# Altium PCB 56PCB原始 -已解锁.pcbdoc (part 2 of 3)
Units mm, origin at the board's own origin, x right, y up, seen from the top; angles counter-clockwise.
Board outline 101.98 x 99.56 mm, 2 copper layers (Top Layer, Bottom Layer); 160 components, 0 nets, 663 pads, 274 vias.
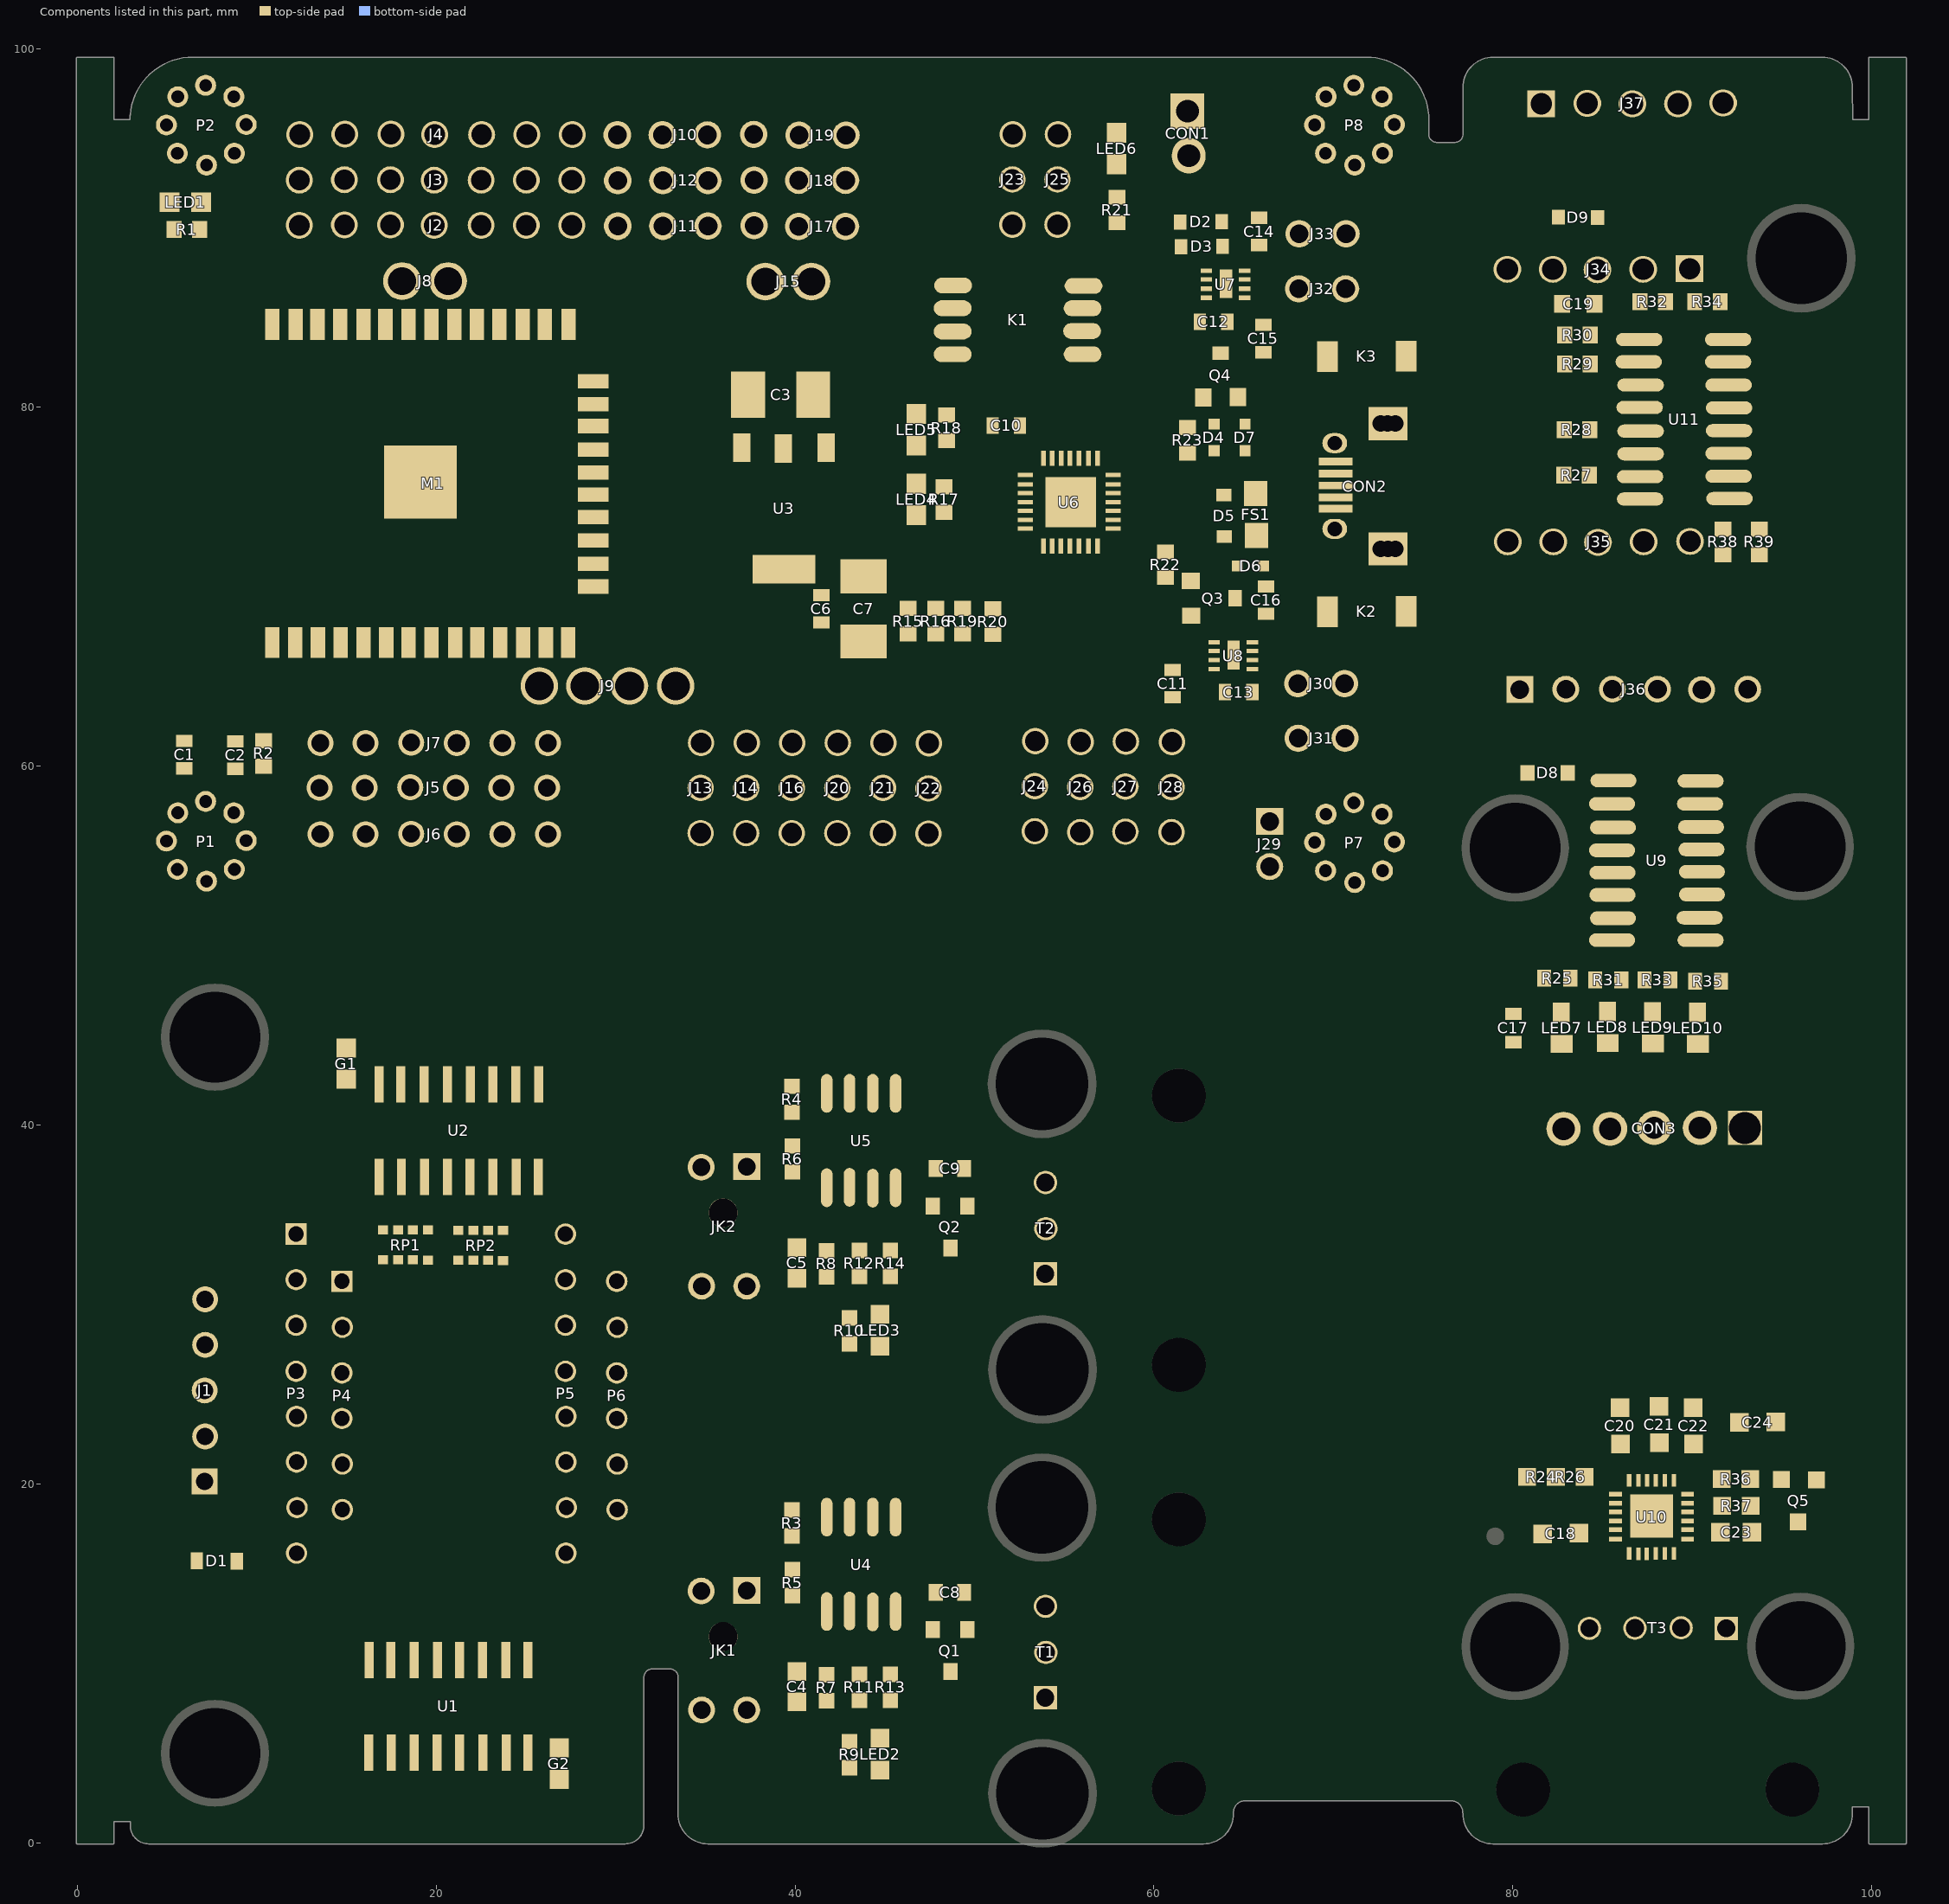
[diagram p2: the components of this part, seen from the top]

## Via types
v1: diameter 0.6, hole 0.4, Top Layer to Bottom Layer, tented both sides, 274 vias

## Nets (pads, with @x,y where several pads share a name; then routed paths per layer and width w, separated by ;. In a path a pad name is that pad's centre, name@x,y a point inside that pad or via, vN(x,y) a via of type N, cw(c..) or ccw(c..) an arc to the next point about the centre after c; other vN are vias at no path point) (continued)
copper on no net: | length 3941.9
  Top Layer w0.125: 78.241,89.351 78.622,89.732 78.622,90.976 79.663,92.018 97.723,92.018 97.875,92.17 97.875,97.91 97.266,98.52 82.026,98.52 81.645,98.139 81.645,97.148 81.416,96.92 79.638,96.92 v1(78.673,97.885) ; 80.959,69.589 80.959,74.898 ; 82.749,85.769 82.749,86.366 83.524,87.141 83.524,88.843 82.991,89.376 78.317,89.376 78.012,89.071 78.012,70.097 78.622,69.488 97.621,69.488 98.18,70.047 98.18,83.382 97.291,84.271 v1@94.954,84.271
  Top Layer w0.151: 4.143,20.142 7.102,20.142 ; v1@6.353,40.284 8.969,40.284 11.255,42.57 v1(11.255,48.641) ; v1@6.404,40.411 5.616,40.411 4.118,38.913 4.118,8.56 4.372,8.306 5.616,8.306 6.454,9.144 8.994,9.144 11.687,6.452 11.687,2.311 v1(11.026,1.651) ; v1@11.026,1.524 11.915,0.635 29.238,0.635 30.178,1.575 v1(30.178,1.829) ; v1@11.179,48.666 11.407,48.895 v1@29.06,48.895 ; v1(12.271,13.894) 15.319,13.894 15.649,13.564 v1@15.649,12.903 ; 14.43,48.895 14.709,48.616 14.709,44.247 ; v1(18.113,39.319) 22.507,39.319 v1@22.914,39.726 ; v1@27.435,11.278 27.943,11.278 29.645,12.979 v1(29.645,16.104) ; 29.06,49.149 29.289,48.92 v1(29.289,42.57) ; v1@29.213,34.569 v1@29.213,42.697
  Top Layer w0.176: 88.985,16.142 91.106,14.021
  Top Layer w0.202: 37.087,77.26 36.35,77.26 35.791,77.819 35.791,80.969 36.604,81.781 38.154,81.781 38.281,81.654
  Top Layer w0.227: 55.057,85.528 54.486,86.099 54.486,87.369 56.111,88.995 59.998,88.995 61.382,87.611 62.919,87.611 ; 56.01,86.938 56.01,87.877 56.569,88.436 59.718,88.436 61.026,87.128 62.919,87.128 ; 65.052,86.62 68.164,86.62 ; 65.052,87.128 66.436,87.128 v1@67.008,87.7
  Top Layer w0.252: 49.05,68.853 48.949,68.954 48.949,71.672 51.26,73.984 51.26,75.101 51.87,75.711 52.822,75.711 ; 50.498,75.355 51.387,76.244 52.822,76.244 ; 51.031,68.777 51.031,68.878 50.346,69.564 50.346,72.129 51.87,73.653 51.87,74.441 52.149,74.72 52.822,74.72 ; v1(54.74,79.597) 54.829,79.508 54.829,77.159 ; 55.311,77.159 55.311,78.848 v1(56.721,80.257) ; 55.819,75.546 55.819,77.159 ; 57.724,74.238 58.448,74.238 59.617,73.069 v1(59.617,72.917) ; 57.724,74.72 59.134,74.72 59.54,74.314 v1(59.769,74.314) ; 57.724,75.228 58.982,75.228 59.439,75.685 v1(59.769,75.685) ; 57.724,76.244 58.702,76.244 59.134,76.676 60.785,76.676 ; 60.633,70.529 61.928,70.529 ; 60.683,71.85 60.785,71.952 60.785,80.384 62.284,81.883 63.452,81.883 64.671,80.664 ; v1(61.801,67.126) 61.801,66.897 62.271,66.427 63.35,66.427 ; 61.877,77.463 61.699,77.286 61.699,73.298 63.274,71.723 63.274,69.539 62.131,68.396 62.08,68.396 ; 63.35,66.91 v1@63.35,67.888 ; 64.519,69.361 65.268,68.611 69.662,68.611 ; 65.484,65.919 66.284,65.919 68.024,64.179 68.024,61.563 ; 65.484,66.427 66.767,66.427 67.364,65.83 69.726,65.83 70.564,64.992 70.564,61.766 ; 82.318,20.218 82.318,19.202 83.067,18.453 85.721,18.453 ; 83.689,17.259 83.689,17.45 84.185,17.945 85.721,17.945 ; 83.791,20.472 83.791,19.787 84.642,18.936 85.721,18.936 ; v1@85.62,15.011 86.483,15.875 86.483,16.142 ; 85.721,17.462 87.194,17.462 v1@88.325,17.462 ; v1@88.261,18.796 88.972,19.507 88.972,20.206 ; 89.734,17.462 91.347,17.462 ; 89.734,18.936 91.424,18.936 ; 89.734,19.444 89.773,19.444 90.75,20.422 91.411,20.422
  Top Layer w0.254: 88.972,15.243 88.972,16.142
  Top Layer w0.278: 9.452,40.767 9.452,40.183 16.31,33.325 25.123,33.325 25.174,33.376 ; v1(53.825,80.816) 53.825,83.407 54.689,84.271 55.908,84.271 ; 55.057,85.528 56.023,85.528 ; v1@55.324,80.664 55.324,82.518 55.629,82.823 ; 63.35,77.59 v1(63.35,76.803) 63.63,76.524 66.754,76.524 68.291,74.987 70.126,74.987 ; v1(64.417,77.59) 66.678,77.59 68.621,75.647 70.126,75.647 ; v1(78.101,47.981) 78.508,47.574 78.508,45.669 ; v1@78.152,59.411 78.152,64.592 v1@78.406,64.846 ; 78.152,62.027 78.355,61.824 80.667,61.824 ; 79.016,17.094 80.413,15.697 84.858,15.697 85.721,16.561 85.721,16.929 ; 79.981,46.177 79.981,48.412 81.886,50.317 85.531,50.317 ; 80.209,46.177 78.736,46.177 78.508,45.949 v1(78.508,36.855) 97.507,36.855 97.735,37.084 v1@97.735,51.714 ; 80.311,64.338 80.311,62.179 80.667,61.824 ; v1(97.786,51.613) cw(c96.429,55.431) v1(97.761,59.258) 97.761,64.719 97.202,65.278 97.202,64.948 94.078,61.824 80.667,61.824
  Top Layer w0.303: 8.944,59.912 10.747,59.912 11.407,60.572 11.407,63.112 13.411,65.116 13.411,66.897 ; 47.831,68.802 47.806,68.827 47.806,71.545 50.498,74.238 50.498,75.355
  Top Layer w0.329: v1@34.521,71.571 35.283,70.809 35.283,61.83 34.763,61.309 ; 37.303,61.309 37.303,61.347 ; 46.307,68.802 47.831,68.802 ; 61.903,79.013 61.903,79.699 62.741,80.537 62.741,80.562
  Top Layer w0.354: 5.362,89.986 5.362,91.459 ; 6.734,89.96 6.785,90.011 9.629,90.011 12.423,87.217 v1@14.532,87.217 ; v1@10.671,80.638 9.807,79.775 9.807,70.707 12.068,68.446 21.745,68.446 22.355,67.837 22.355,67.049 ; v1(11.611,78.454) 11.763,78.302 11.763,71.774 13.312,70.224 22.431,70.224 24.819,67.837 24.819,66.745 ; v1(11.687,82.137) 11.687,80.232 10.595,79.14 10.595,71.545 12.779,69.361 22.101,69.361 23.574,67.888 23.574,66.973 ; 12.144,84.728 12.144,83.356 12.703,82.797 12.703,72.129 13.668,71.164 22.888,71.164 v1(24.641,69.412) ; v1(13.211,63.29) 12.195,62.274 12.195,57.524 13.389,56.331 ; 13.338,84.525 13.516,84.347 13.516,72.815 v1(14.1,72.231) ; v1@14.405,88.436 15.192,88.436 16.132,89.376 16.132,93.923 17.529,95.32 ; v1(14.43,73.704) 14.328,73.806 14.328,79.47 v1(15.141,80.283) ; 14.655,84.626 14.684,84.598 14.684,82.264 16.564,80.384 23.726,80.384 23.726,79.445 24.361,78.81 v1@25.708,78.81 ; 14.735,67.227 14.735,57.55 16.068,56.216 ; v1(15.878,64.56) 15.951,64.633 15.951,66.897 ; 15.979,84.448 15.979,82.67 17.148,81.502 22.685,81.502 24.006,82.823 v1(25.53,82.823) ; v1@17.17,83.004 17.17,84.626 ; v1@17.221,63.141 17.221,66.897 ; 18.465,66.897 18.465,64.106 19.789,62.782 19.789,57.524 18.672,56.407 ; v1(19.662,82.797) 19.789,82.924 19.789,84.572 19.735,84.626 ; 19.735,66.897 19.735,64.868 v1(20.983,63.62) ; 21.005,84.626 21.085,84.547 v1@21.085,82.67 ; 21.056,66.897 21.056,65.402 22.38,64.078 22.38,57.55 23.688,56.242 23.688,56.216 ; 22.275,84.626 22.329,84.572 22.329,82.899 v1(22.406,82.823) ; 22.507,95.193 21.263,93.948 21.263,89.097 22.685,87.674 23.472,87.674 24.895,86.252 24.895,84.706 24.815,84.626 ; v1@22.71,86.709 23.599,85.82 23.599,84.677 23.422,84.499 ; v1@22.939,65.195 23.65,64.484 25.746,64.484 ; 23.726,80.232 23.726,81.096 24.361,81.731 26.317,81.731 27.028,82.442 v1(27.028,82.747) ; v1(23.853,88.893) 23.828,88.919 23.828,93.948 24.971,95.091 25.073,95.091 ; v1(24.742,79.927) 25.047,80.232 28.679,80.232 ; 24.819,67.151 24.819,68.065 25.784,69.031 29.949,69.031 31.346,70.428 v1@31.346,83.585 ; 26.06,84.626 26.06,85.715 26.901,86.557 v1(29.01,86.557) ; 26.139,67.075 26.139,68.142 26.343,68.345 30.407,68.345 32.312,70.25 32.312,73.628 v1(32.413,73.73) ; v1(26.317,89.046) 26.317,93.846 27.587,95.116 ; 27.381,84.626 28.552,84.626 29.187,83.991 v1(29.187,83.966) ; 27.435,66.922 31.194,66.922 33.302,69.031 33.302,74.39 32.388,75.304 32.388,84.804 31.423,85.769 31.423,93.846 32.743,95.167 ; 28.752,71.291 29.949,71.291 30.508,71.85 30.508,82.569 30.254,82.823 30.254,87.827 28.908,89.173 28.908,93.897 30.095,95.085 ; 28.752,81.451 v1@28.752,82.591 ; v1(32.667,86.582) 32.667,87.725 33.988,89.046 33.988,93.923 35.258,95.193 35.258,95.269 ; v1(33.353,79.699) 33.277,79.775 33.277,85.261 34.14,86.125 34.14,86.734 36.452,89.046 36.452,93.846 37.722,95.116 ; v1(36.604,87.852) 37.468,88.716 40.973,88.716 41.557,89.3 41.557,93.872 42.878,95.193 42.929,95.193 ; 37.303,61.347 38.154,62.198 38.154,66.999 v1(38.636,67.481) ; v1@39.068,91.154 39.017,91.205 39.017,93.872 40.313,95.167 ; v1@39.449,65.678 39.449,61.715 39.779,61.385 ; v1@40.821,64.865 41.024,64.662 41.024,62.554 42.268,61.309 42.383,61.309 ; v1(42.421,63.773) 42.446,63.773 43.005,64.332 52.886,64.332 55.857,61.36 ; v1@43.64,62.833 44.3,63.493 52.149,63.493 53.267,62.376 53.267,61.385 ; v1(45.799,72.561) 45.799,72.968 46.764,73.933 46.764,73.996 ; 47.069,77.667 47.882,76.854 v1(48.237,76.854) ; 62.563,84.779 62.842,85.058 62.842,86.506 ; v1(81.848,76.117) 82.762,76.117 ; 82.889,82.416 82.889,81.299 v1(82.991,81.197) ; v1(82.991,77.54) 82.991,78.683 ; 84.413,76.143 87.093,76.143 ; 84.439,82.543 87.017,82.543 ; 84.566,78.708 84.591,78.683 87.118,78.683 ; 87.067,80.003 88.757,80.003 89.595,80.842 89.595,85.185 90.204,85.795 ; 87.118,81.248 88.579,81.248 88.884,81.553 88.884,85.363 88.579,85.668 88.579,85.845
  Top Layer w0.379: 16.818,37.122 16.818,35.763 17.884,34.696 17.884,34.176 ; 17.046,34.176 17.046,34.214 15.573,35.687 15.573,38.557 18.037,41.021 18.037,42.494 ; 18.062,37.122 18.062,35.916 18.697,35.281 18.697,34.29 ; v1(19.231,40.437) 19.332,40.538 19.332,42.278 ; 19.358,37.122 19.358,36.017 19.535,35.839 19.535,34.176 ; 20.628,37.211 20.628,35.535 21.237,34.925 21.237,34.15 ; 21.872,37.122 21.872,35.535 22.126,35.281 22.126,34.29 ; 22.558,4.826 22.558,7.112 23.65,8.204 25.377,8.204 26.038,8.865 26.038,34.442 26.851,35.255 26.851,39.929 25.708,41.072 25.708,42.278 ; 22.914,34.315 22.914,35.281 23.168,35.535 23.168,37.122 ; v1(22.99,39.675) 25.098,39.675 25.682,39.091 25.682,35.382 25.174,34.874 25.174,33.376 ; 23.726,34.15 23.726,34.417 24.463,35.154 24.463,37.122 ; 23.853,4.801 23.853,6.883 24.361,7.391 26.52,7.391 31.194,12.065 31.194,30.277 30.165,31.305 ; 26.952,0.787 26.952,1.118 ; 26.952,0.94 26.952,3.531 ; 27.155,16.104 28.756,17.704 28.756,27.102 30.089,28.435 30.089,28.74 ; 27.206,26.289 27.206,26.746 28.552,28.092 28.552,29.972 29.886,31.305 ; 57.915,95.307 57.978,95.243 60.658,95.243 61.852,96.437 ; v1@80.781,82.315 80.781,75.076 81.873,73.984 86.928,73.984 87.182,74.238 87.182,74.898 ; 80.933,79.14 v1(81.721,79.14) ; 87.118,77.413 89.087,77.413 89.214,77.286 89.214,74.339 89.671,73.882 91.119,73.882 91.703,73.298 ; 89.9,72.333 90.433,71.799 91.703,71.799
  Top Layer w0.405: 7.115,27.686 7.166,27.737 9.071,27.737 10.036,26.772 10.036,11.938 14.709,7.264 17.961,7.264 18.773,6.452 18.773,5.042 ; 7.42,30.302 9.172,30.302 10.849,28.626 10.849,12.268 15.04,8.077 18.443,8.077 20.043,6.477 20.043,5.042 ; 12.22,16.154 12.982,16.154 13.541,16.713 13.541,22.581 14.621,23.66 14.748,23.66 ; 12.22,23.774 12.22,23.8 14.633,26.213 ; v1(14.963,32.969) 14.252,32.969 13.592,32.309 13.592,28.245 14.278,27.559 15.751,27.559 16.64,26.67 16.64,14.986 17.478,14.148 17.478,10.198 ; 15.497,13.081 16.259,12.319 16.259,9.982 ; v1@15.929,29.972 16.005,29.896 16.005,28.677 17.453,27.229 17.453,15.926 18.723,14.656 18.723,10.617 ; 17.097,32.385 17.097,29.108 v1(17.224,28.981) ; 17.961,32.385 17.961,29.693 18.265,29.388 v1@18.265,28.651 ; v1(18.57,23.165) 18.57,23.216 19.307,23.952 19.307,29.667 18.697,30.277 18.697,32.499 ; v1@19.078,21.006 19.078,16.078 20.069,15.088 20.069,10.198 ; 19.535,32.474 19.535,30.937 20.348,30.124 v1@20.348,24.46 ; v1@20.221,19.812 20.221,16.612 21.288,15.545 21.288,10.287 ; v1@20.805,31.394 20.805,32.106 21.11,32.41 ; v1(21.136,7.849) 21.263,7.722 v1(21.263,3.15) ; v1(21.364,17.526) 21.364,27.102 22.075,27.813 22.075,32.474 ; v1@22.482,22.047 22.482,26.213 22.888,26.619 22.888,32.474 ; v1(22.507,18.72) 22.583,18.644 22.583,10.198 ; v1(23.676,25.324) 23.803,25.451 23.803,32.372 ; 23.803,10.185 v1(23.803,22.758) ; v1@24.717,26.06 25.098,25.679 25.098,10.058 ; v1(48.441,87.801) 48.441,87.776 49.101,87.115 49.101,86.861 ; 48.695,85.541 50.549,85.541 v1(50.777,85.769) ; 48.783,84.232 50.587,84.232 51.844,85.49 v1(51.844,86.582) ; 58.397,65.195 58.397,61.36 58.448,61.309 ; 69.637,74.352 69.535,74.352 69.065,73.882 68.253,73.882 68.049,73.679 68.049,73.171 68.024,73.145 66.906,73.145 66.906,74.441 66.703,74.644 65.281,74.644 65.179,74.746 65.179,75.279 65.332,75.431 66.678,75.431 67.757,74.352 70.126,74.352 ; 79.689,72.561 79.689,82.95 80.781,84.042 82.889,84.042 ; 82.305,72.409 82.33,72.409 84.134,70.605 92.973,70.605 93.837,71.469 93.837,71.799 ; 84.362,84.118 84.693,83.788 87.042,83.788 ; 84.718,89.401 90.966,89.401 91.449,88.919 91.449,88.208 92.795,86.861 92.795,84.017 92.617,83.839 ; 87.207,85.795 87.207,87.598 ; 89.925,87.649 90.382,87.649 91.551,86.48 91.551,85.896 ; 92.109,82.543 93.557,82.543 94.141,81.959 94.141,73.552 93.938,73.349 93.71,73.349
  Top Layer w0.43: 20.094,44.628 20.653,44.069 20.653,42.164 ; v1@47.831,66.237 47.831,67.38 ; 49.33,67.38 49.33,66.618 50.752,65.195 58.397,65.195 ; 57.661,65.195 62.69,65.195 62.995,65.5 62.995,65.703 63.071,65.779 63.452,65.779 ; 62.83,65.335 63.388,65.335 ; 70.678,86.798 70.704,86.823 70.704,89.681
  Top Layer w0.456: v1(21.618,44.78) 21.898,44.501 21.898,42.278 ; 23.168,42.278 v1@23.168,44.145 ; 46.764,79.635 48.58,79.635 ; 48.593,78.149 48.593,78.073 49.66,77.006 ; 48.783,82.962 49.342,82.962 49.584,82.721 v1(49.584,81.883) ; v1(61.649,84.423) 61.674,84.423 62.03,84.779 62.563,84.779 ; v1(61.826,82.924) 61.852,82.95 69.548,82.95 ; v1(95.17,16.866) 95.17,16.891 95.932,17.653 95.932,18.034
  Top Layer w0.481: 5.972,61.411 7.013,62.452 10.214,62.452 ; 10.29,61.512 10.29,63.824 v1@10.798,64.332 ; 20.653,42.266 20.653,39.649 20.856,39.446 ; 26.47,70.504 26.952,70.021 28.883,70.021 ; 34.845,7.772 36.293,9.22 39.874,9.22 40.154,9.5 40.154,13.03 39.722,13.462 ; 34.845,31.388 36.293,32.836 39.874,32.836 40.154,33.115 40.154,36.646 39.722,37.077 ; 35.353,7.29 35.353,7.772 ; 35.353,30.905 35.353,31.388 ; 37.309,14.072 37.36,14.072 38.299,15.011 38.299,17.856 38.884,18.44 39.823,18.44 ; 37.309,37.687 37.36,37.687 38.299,38.627 38.299,41.472 38.884,42.056 39.823,42.056 ; 39.823,17.107 39.849,17.081 39.849,15.291 39.976,15.164 46.504,15.164 47.062,14.605 47.062,9.042 45.983,7.963 43.583,7.963 ; 39.823,40.722 39.849,40.697 39.849,38.906 39.976,38.779 46.504,38.779 47.062,38.22 47.062,32.658 45.983,31.578 43.583,31.578 ; 40.331,12.827 41.728,12.827 ; 40.331,36.442 41.728,36.442 ; 41.754,9.385 43.595,9.385 ; 41.754,33.001 43.595,33.001 ; 43.037,9.614 43.037,12.929 ; 43.037,33.229 43.037,36.544 ; 44.37,13.03 44.37,11.227 45.31,10.287 45.31,9.411 ; 44.37,36.646 44.37,34.842 45.31,33.902 45.31,33.026 ; 45.691,12.751 46.935,12.751 ; 45.691,36.366 46.935,36.366 ; 46.935,11.709 47.723,11.709 ; 46.935,35.325 47.723,35.325 ; 47.24,14.021 47.926,14.021 ; 47.24,37.636 47.926,37.636 ; 57.94,91.713 57.94,93.529 ; 68.075,86.531 68.176,86.633 68.176,89.592 68.087,89.681 ; 83.867,20.345 84.324,20.345 86.305,22.327 92.782,22.327 ; v1@89.341,79.241 90.103,80.003 92.135,80.003 ; v1(90.306,77.438) 92.02,77.438 ; v1@90.408,76.168 92.02,76.168 ; v1(90.433,81.248) 92.02,81.248 ; v1@90.458,78.708 92.046,78.708 ; 92.782,23.368 92.782,21.844 93.189,21.438 94.332,21.438 94.954,20.815 94.954,20.256 ; 93.113,18.72 93.113,21.514
  Top Layer w0.506: 46.84,75.508 48.212,75.508 48.288,75.584
  Top Layer w0.532: 6.658,15.735 v1@6.658,16.662 ; 8.944,15.519 8.944,10.846 14.913,4.877 14.913,2.896 15.954,1.854 24.082,1.854 25.073,2.845 25.073,5.131 25.174,5.232 26.787,5.232 26.851,5.296 ; v1(12.347,42.316) 16.589,42.316 16.818,42.545 16.818,44.145 18.723,46.05 23.371,46.05 24.412,45.009 24.412,42.139 ; 17.503,1.854 17.503,5.042 ; 64.646,71.164 64.646,72.206 65.23,72.79 65.789,72.79 ; 65.052,85.845 65.916,85.845 v1(66.043,85.718)
  Top Layer w0.557: 43.24,3.988 44.827,3.988 ; 43.24,27.603 44.827,27.603 ; 44.853,5.715 v1(45.97,5.715) ; 44.853,29.33 v1(45.97,29.33) ; 48.688,9.449 49.272,9.449 v1(49.831,10.008) ; 48.688,33.064 49.272,33.064 v1(49.831,33.623) ; 63.909,88.893 65.713,88.893 65.865,89.046
  Top Layer w0.633: 51.031,77.336 51.031,81.705 v1(52.479,83.153)
  Top Layer w0.659: 82.534,90.608 82.622,90.519 v1(83.397,90.519) ; 84.718,85.845 84.718,90.582
  Top Layer w0.71: v1@46.256,71.317 46.307,71.317 49.634,74.644 49.634,77.032 49.761,77.159 54.054,77.159 ; v1(80.108,59.563) 80.184,59.639 80.819,59.639 ; 81.708,48.057 81.708,47.269 82.673,46.304 82.673,46.177 ; v1@83.029,58.623 83.029,59.766 ; v1@83.08,48.844 83.181,48.743 83.181,48.082 ; 84.527,48.057 84.527,46.99 85.112,46.406 85.112,46.279 ; 85.391,51.562 87.144,51.562 v1(87.245,51.46) ; 85.531,57.912 v1@87.194,57.912 ; 85.556,52.832 v1@88.134,52.832 ; 85.607,59.207 v1@87.144,59.207 ; v1(85.823,48.92) 85.95,48.793 85.95,47.955 ; 87.372,48.031 87.372,46.609 87.677,46.304 ; v1(87.728,55.931) 87.728,56.617 89.023,57.912 90.522,57.912 ; v1@88.718,59.182 90.458,59.182 ; 88.782,48.108 88.782,48.755 88.363,49.174 88.363,50.876 89.049,51.562 90.522,51.562 ; 90.141,46.444 90.141,48.133 ; 90.535,52.857 91.97,52.857 92.909,51.918 v1(92.909,51.486) ; 90.623,50.241 92.909,50.241 93.621,49.53 93.621,44.679 v1@93.443,44.501 ; 91.601,48.031 v1@91.601,49.035
  Top Layer w0.786: v1(62.995,75.406) 64.036,75.406 64.036,74.593 v1(63.071,74.593) ; 63.198,74.974 63.681,74.974 63.757,74.898
  Top Layer w0.837: 37.773,89.96 40.211,89.96
  Top Layer w0.862: v1@10.798,64.332 11.103,64.332 12.144,65.373 12.144,67.024
  Top Layer w0.913: 80.032,44.628 80.159,44.501 v1@93.443,44.501
  Top Layer w0.938: 12.347,92.678 15.09,92.678 ; 17.605,92.653 19.993,92.653 ; 39.271,77.768 39.424,77.616 39.424,71.164 ; 39.5,75.939 35.995,75.939 34.674,77.26 34.674,81.4 38.255,84.982 41.786,84.982 43.615,86.811 v1(43.615,87.801)
  Top Layer w0.989: 16.043,58.832 18.557,58.832 ; 23.637,58.807 26.177,58.807
  Bottom Layer w0.151: 78.673,92.602 79.689,92.602 81.01,91.281 81.01,85.541 80.806,85.337
  Bottom Layer w0.202: 80.806,85.337 80.806,80.08 81.797,79.089 v1(89.265,79.089)
  Bottom Layer w0.252: v1@78.673,97.91 78.673,89.452 77.962,88.741 77.962,70.275 v1(78.52,69.716) 97.621,69.716 98.307,70.402 98.307,83.178 97.393,84.093 94.903,84.093 92.414,86.582 92.414,89.909 94.675,92.17 98.002,92.17 98.002,97.91 v1@97.672,98.241 ; v1@78.673,98.012 78.673,97.098 78.851,96.92 82.051,96.92
  Bottom Layer w0.278: v1(12.271,13.894) 14.709,13.894 21.364,7.239 v1@21.364,3.124 ; v1(18.113,39.319) 22.812,39.319 23.472,39.98 29.137,39.98 ; 18.824,9.652 25.962,9.652 29.645,13.335 v1(29.645,16.104) ; 29.137,34.011 v1(29.137,48.844) 28.933,48.641 v1(11.255,48.641) 11.255,43.18 8.41,40.335 v1(6.429,40.335) 6.378,40.335 4.194,38.151 4.194,8.56 4.549,8.204 4.549,7.849 3.686,6.985 3.686,1.905 4.549,1.041 10.315,1.041 12.398,3.124 28.883,3.124 v1(30.178,1.829) ; v1@78.177,59.385 78.177,64.694 78.431,64.948 80.108,64.948 80.717,64.338
  Bottom Layer w0.303: v1(45.799,72.561) 46.764,72.561 48.745,70.58 57.331,70.58 58.753,72.002 58.753,73.399 v1@59.667,74.314 ; 46.612,73.882 49.279,71.215 57,71.215 58.143,72.358 58.143,74.39 59.439,75.685 v1(59.769,75.685) ; v1(59.617,72.917) 61.191,72.917 61.649,73.374 v1@61.928,73.374 ; v1(78.101,47.981) 78.101,37.135 78.431,36.805 97.431,36.805 97.837,37.211 97.837,51.689 97.761,51.613 94.51,51.613 92.097,54.026 92.097,58.344 94.332,60.579 97.481,60.579 ; v1(87.245,51.46) 88.515,51.46 90.776,53.721 90.776,60.096 94.433,63.754 94.433,65.1 93.824,65.71 91.944,65.71 90.471,64.237 90.471,64.211 ; v1(88.261,52.756) 88.337,52.756 90.065,54.483 90.065,61.29 93.036,64.262 ; v1(97.481,65.1) 97.481,59.538 v1(97.761,59.258)
  Bottom Layer w0.354: v1(53.825,80.816) 53.825,80.943 54.74,81.858 60.15,81.858 62.741,79.267 65.255,79.267 66.271,78.251 66.271,70.986 63.452,68.167 v1(63.452,67.989) ; v1@54.664,79.724 54.968,79.419 59.236,79.419 61.776,76.879 63.274,76.879 v1(63.35,76.803) ; v1@55.299,80.816 55.654,81.172 59.82,81.172 62.411,78.581 64.976,78.581 65.662,77.895 65.662,71.52 61.801,67.659 v1(61.801,67.126) ; v1(56.721,80.257) 59.413,80.257 61.953,77.717 64.29,77.717 v1(64.417,77.59) ; 79.689,87.7 79.689,77.997 81.568,76.117 v1(81.848,76.117) ; 82.229,87.7 82.229,82.035 v1@82.965,81.299
  Bottom Layer w0.379: 7.115,25.146 9.807,27.838 9.807,34.798 15.548,40.538 v1@19.129,40.538 ; 7.115,30.226 7.115,34.849 16.691,44.425 21.263,44.425 v1(21.618,44.78) ; 7.14,27.762 8.791,29.413 8.791,35.179 17.046,43.434 22.634,43.434 23.168,43.967 v1@23.168,44.323 ; v1@9.452,59.531 9.553,59.531 11.458,57.626 11.458,55.594 13.058,53.994 30.305,53.994 31.397,52.902 49.711,52.902 51.666,54.857 51.666,62.477 53.749,64.56 61.268,64.56 v1@65.205,68.497 ; 12.144,34.061 12.169,34.061 14.76,31.471 v1@20.831,31.471 ; 12.195,28.854 12.271,28.854 13.49,27.635 15.675,27.635 16.665,26.645 24.006,26.645 25.479,25.171 28.705,25.171 30.064,23.812 ; 12.22,21.234 12.296,21.234 13.49,20.041 16.564,20.041 16.945,19.66 v1@20.297,19.66 ; 12.246,18.694 12.347,18.694 13.693,17.348 21.186,17.348 v1(21.364,17.526) ; 12.271,31.445 12.22,31.445 10.976,30.201 10.976,25.908 11.788,25.095 12.779,25.095 13.541,24.333 13.541,22.606 14.913,21.234 14.913,21.438 15.548,22.073 v1@22.558,22.073 ; 12.423,26.289 12.982,26.289 14.1,25.171 15.344,25.171 16.005,24.511 18.9,24.511 20.297,23.114 23.752,23.114 24.184,22.682 28.654,22.682 30.026,21.311 30.026,21.209 ; 14.748,23.66 15.002,23.66 15.446,23.216 v1@18.519,23.216 ; 14.748,26.2 14.913,26.365 15.675,26.365 16.411,25.629 23.447,25.629 v1@23.676,25.4 ; 14.773,18.58 15.103,18.58 15.268,18.745 27.206,18.745 27.257,18.694 ; v1(14.963,32.969) 15.014,33.02 26.19,33.02 27.105,33.934 ; 14.989,28.829 15.852,28.829 17.046,27.635 v1(20.348,27.635) ; v1(15.929,29.896) 15.929,30.226 16.208,30.505 19.485,30.505 19.637,30.353 24.742,30.353 25.936,31.547 27.105,31.547 27.282,31.369 ; v1(17.224,28.981) 17.224,29.185 17.783,29.743 19.231,29.743 19.459,29.515 25.327,29.515 26.038,30.226 28.781,30.226 30.089,28.918 30.089,28.74 ; v1(18.367,28.626) 18.494,28.753 26.876,28.753 27.054,28.931 28.121,28.931 29.391,27.661 30.762,27.661 31.296,27.127 31.296,19.964 30.089,18.758 30.089,18.58 ; v1(19.078,20.93) 26.978,20.93 27.308,21.26 ; v1(20.374,24.409) 20.475,24.511 22.939,24.511 23.295,24.155 26.876,24.155 27.155,23.876 ; v1(21.872,27.661) 21.948,27.737 27.943,27.737 29.48,26.2 30.064,26.2
  Bottom Layer w0.405: v1(10.671,80.664) 10.772,80.562 11.585,80.562 12.728,81.705 12.728,87.242 13.897,88.411 v1(14.481,88.411) ; v1(11.611,78.454) 11.509,78.454 9.731,80.232 9.731,86.887 10.899,88.055 10.899,93.897 12.207,95.205 ; v1(11.687,82.137) 11.585,82.239 11.585,87.446 13.566,89.427 13.566,93.973 14.913,95.32 ; v1(13.211,63.29) 13.211,63.316 14.405,64.509 15.827,64.509 v1(15.878,64.56) ; v1(14.1,72.231) 14.201,72.231 22.202,64.23 23.752,64.23 23.98,64.459 23.98,65.221 24.895,66.135 30.153,66.135 ; v1(14.405,87.242) 14.125,86.963 14.125,75.635 15.446,74.314 15.446,73.501 21.009,67.938 v1@32.108,67.938 ; v1(14.43,73.704) 14.43,73.374 20.805,66.999 34.801,66.999 38.027,63.773 42.319,63.773 v1@42.421,63.671 ; v1(15.141,80.283) 15.141,80.892 ; 15.408,81.159 15.141,80.892 ; v1@17.224,83.001 17.224,82.975 15.141,80.892 ; v1@17.3,63.163 17.199,63.062 17.199,58.109 17.732,57.575 19.535,57.575 20.78,56.331 21.059,56.331 ; v1@19.586,82.823 19.586,80.918 30.686,69.818 34.623,69.818 38.662,65.779 v1(39.551,65.779) ; 19.993,95.294 18.697,93.999 18.697,89.452 19.383,88.766 21.847,88.766 22.71,87.903 v1(22.71,86.658) ; v1(20.983,63.62) 21.313,63.29 23.803,63.29 24.819,62.274 24.819,57.601 26.203,56.216 26.228,56.216 ; v1(21.11,82.645) 21.11,80.664 31.194,70.58 35.487,70.58 v1@38.585,67.481 ; v1(22.406,82.823) 22.304,82.721 22.304,80.765 31.727,71.342 34.267,71.342 v1(34.521,71.596) ; 22.888,66.973 22.888,65.297 v1(22.939,65.246) ; v1(23.853,88.893) 23.904,88.843 23.904,84.55 23.498,84.144 23.498,81.096 24.666,79.927 v1(24.742,79.927) ; v1(24.641,69.412) 25.098,68.954 34.14,68.954 38.281,64.814 v1@40.795,64.814 ; v1(25.758,78.86) 25.758,78.683 31.702,72.739 45.621,72.739 v1(45.799,72.561) ; v1(26.317,89.046) 26.317,88.843 24.895,87.42 24.895,84.042 24.514,83.661 24.514,81.604 v1@32.388,73.73 ; v1(27.028,82.747) 26.927,82.848 26.927,86.049 28.679,87.801 v1@36.528,87.801 ; 28.222,64.382 28.222,65.983 ; v1(28.756,82.594) 29.06,82.594 31.905,79.749 33.302,79.749 v1(33.353,79.699) ; 28.933,66.135 34.242,66.135 37.62,62.757 v1(43.589,62.757) ; v1@29.035,86.582 v1(32.667,86.582) ; v1(29.187,83.966) 29.187,83.915 32.337,80.765 51.819,80.765 54.054,83.001 v1@61.75,83.001 ; v1@31.372,83.559 33.302,81.629 49.33,81.629 v1(49.584,81.883) ; 31.829,96.767 35.233,96.767 36.757,98.291 46.866,98.291 49.761,95.396 49.761,89.147 51.844,87.065 v1(51.844,86.582) ; 35.131,95.345 35.36,95.345 37.392,97.377 46.358,97.377 48.847,94.888 48.847,88.944 50.701,87.09 50.701,85.795 v1@50.803,85.693 ; 37.849,95.345 37.849,96.132 38.357,96.64 45.596,96.64 47.958,94.278 47.958,88.284 v1(48.441,87.801) ; v1(39.017,91.23) 39.017,89.503 38.357,88.843 28.07,88.843 25.936,86.709 25.936,83.28 25.403,82.747 25.403,82.188 33.709,73.882 46.612,73.882 46.612,75.863 47.602,76.854 v1(48.237,76.854) ; v1(52.479,83.153) 53.698,84.372 v1@61.572,84.372
  Bottom Layer w0.43: 30.095,95.186 30.248,95.186 31.829,96.767 ; 45.85,67.43 48.618,67.43 49.406,66.643 v1@49.406,66.465 ; v1(82.991,77.54) 85.607,77.54 87.334,75.812 87.334,72.561 ; 84.743,72.485 84.82,72.485 86.217,71.088 90.712,71.088 91.398,71.774 91.398,76.066 91.271,76.193 v1@90.357,76.193 ; 86.775,96.996 86.039,96.259 86.039,85.718 v1@90.433,81.324 ; 89.138,96.793 89.138,96.844 90.535,98.241 92.973,98.241 93.735,97.479 93.735,92.957 91.5,90.722 91.5,84.372 92.186,83.686 92.186,78.81 90.814,77.438 v1(90.306,77.438) ; v1@90.484,78.81 90.636,78.81 91.347,79.521 91.347,82.747 88.604,85.49 88.604,91.357 91.703,94.456 91.703,97.098 ; 91.398,75.889 91.398,76.422 93.075,78.098 93.075,84.296 v1(92.744,84.626)
  Bottom Layer w0.481: v1(45.361,10.312) 46.021,9.652 46.021,8.407 ; v1(45.361,33.928) 46.021,33.267 46.021,32.023 ; v1(45.97,5.715) 46.021,5.766 46.021,8.407 ; v1(45.97,29.33) 46.021,29.381 46.021,32.023 ; v1@47.856,66.11 48.415,65.551 58.55,65.551 64.671,71.672 v1(64.671,72.18) ; v1@49.831,10.084 50.314,10.566 53.922,10.566 ; v1@49.831,33.699 50.314,34.182 53.922,34.182 ; 53.946,8.103 46.326,8.103 46.021,8.407 ; 53.946,31.718 46.326,31.718 46.021,32.023 ; v1(67.059,87.7) 66.729,88.03 66.729,90.367 67.465,91.103 69.675,91.103 70.615,90.163 70.615,89.554 ; 84.263,11.966 84.263,13.734 84.832,14.303 89.201,14.303 89.938,15.04 89.938,17.983 90.928,18.974 v1(90.928,18.999) ; v1(85.62,15.192) 85.62,20.65 86.966,21.996 v1(86.966,22.377) ; 86.803,11.977 86.96,12.133 86.96,13.179 87.296,13.516 89.531,13.516 91.106,15.09 91.106,16.891 92.249,18.034 92.249,19.609 91.411,20.447 v1@90.725,20.447 ; 89.375,11.998 89.375,12.14 92.046,14.811 92.046,15.418 93.494,16.866 v1(95.17,16.866)
  Bottom Layer w0.532: 85.442,64.287 85.442,58.699 86.305,57.836 v1(87.22,57.836) ; v1(87.194,59.08) 87.194,59.411 87.982,60.198 87.982,64.084
  Bottom Layer w0.557: v1(83.397,90.519) 84.185,91.306 84.185,97.021
  Bottom Layer w0.583: v1@8.994,14.148 7.089,14.148 5.362,15.875 5.362,35.281 12.347,42.266 v1(12.347,42.316)
  Bottom Layer w0.608: 65.23,89.528 65.89,88.868 65.89,85.947 68.735,83.102 68.735,67.989 66.221,65.475 v1@66.221,64.662
  Bottom Layer w0.71: 85.442,39.929 85.899,40.386 85.899,51.918 88.896,54.915 88.896,58.801 v1(88.617,59.08) ; 87.982,39.751 87.982,48.26 v1@88.744,49.022 ; 90.496,39.802 90.522,39.827 90.522,48.006 93.011,50.495 v1@93.011,51.46 ; v1@92.782,44.653 93.062,44.374 93.062,39.954 ; 93.494,39.929 v1@93.494,44.704
  Bottom Layer w0.735: v1(6.683,16.688) 7.191,16.688 ; v1@60.175,90.062 60.328,89.909 ; 82.826,39.878 83.384,40.437 83.384,50.927 87.728,55.27 v1(87.728,55.931)
  Bottom Layer w0.76: 7.128,22.657 8.055,22.657 8.842,21.869 8.842,18.339 7.191,16.688 ; 36.909,79.749 52.962,79.749 54.232,78.479 58.728,78.479 61.572,75.635 63.706,75.635 61.699,75.635 ; 60.328,89.909 60.328,87.801 67.592,80.537 v1@67.592,73.577
  Bottom Layer w0.786: v1@66.221,64.662 66.221,57.156 66.449,56.927
  Bottom Layer w0.837: 53.355,56.381 53.355,61.385 ; 55.807,56.305 55.807,61.245 ; 58.41,56.356 58.41,61.525
  Bottom Layer w0.862: 18.583,58.807 23.637,58.807
  Bottom Layer w0.938: v1(80.108,59.563) 80.108,60.223 82.876,62.992 82.876,64.262 ; v1@81.352,44.501 81.352,50.724 84.578,53.95 84.578,56.972 v1(83.003,58.547)
  Bottom Layer w0.964: v1@11.179,64.332 10.925,64.332 11.052,64.205 11.052,60.014 12.246,58.82 16.132,58.82 ; 14.786,92.703 17.453,92.703 ; 19.993,92.729 43.462,92.729 44.58,91.611 44.58,89.376 43.615,88.411 v1@43.615,87.268 ; 26.177,58.807 30.521,58.807 ; 30.775,64.484 30.559,64.268 30.559,56.407 32.845,54.121 44.326,54.121 44.859,54.654 44.859,61.385 45.621,62.147 45.621,70.478 v1@46.282,71.139 ; 34.763,56.305 34.763,61.309 ; 37.303,56.318 37.303,61.309 ; 39.843,56.305 39.843,61.309 ; 42.383,56.305 42.383,61.309
  Bottom Layer w1.091: 52.111,90.189 52.111,96.424 53.114,97.428
  Bottom Layer w1.116: 53.114,97.428 60.988,97.428 61.801,96.615
  other v1: 57.68,0.965 35.15,1.067 63.064,1.067 49.704,1.118 78.431,1.397 78.355,6.934 97.913,7.137 4.524,8.331 27.511,11.354 15.725,12.852 4.219,13.487 8.918,14.122 97.939,14.58 87.194,17.678 88.312,17.704 88.337,18.745 87.194,18.771 20.247,19.736 35.201,20.295 57.959,20.295 49.882,20.32 90.801,20.472 22.507,22.022 57.68,24.581 35.15,24.682 63.064,24.682 49.704,24.733 24.819,25.959 97.761,29.362 78.711,29.642 20.882,31.42 29.137,34.468 97.634,36.932 35.201,43.91 57.959,43.91 49.882,43.935 23.168,44.221 80.971,44.45 81.606,44.475 92.681,44.653 93.341,44.653 21.136,48.793 83.105,48.92 88.617,49.073 91.538,49.098 51.463,52.851 67.618,53.029 10.29,53.079 33.404,57.296 4.245,59.175 78.177,59.309 73.688,59.455 9.528,59.531 7.293,60.572 33.404,62.249 69.37,63.036 17.275,63.087 66.271,63.849 10.798,64.382 11.458,64.382 66.297,64.509 40.871,64.789 78.33,64.897 46.942,65.297 43.919,65.322 9.756,65.424 64.341,65.678 47.856,66.186 64.366,66.364 49.406,66.541 72.19,66.592 32.21,67.989 65.205,68.599 9.883,68.802 39.652,68.827 97.723,69.615 45.672,70.631 46.358,70.656 59.413,70.783 26.47,71.088 46.358,71.291 51.793,72.231 61.826,73.399 67.745,73.552 54.41,73.577 56.34,73.603 67.16,73.603 55.299,73.628 23.955,73.933 20.755,74.111 19.637,74.136 17.427,74.161 18.545,74.161 56.365,74.72 54.359,74.771 55.273,74.771 19.637,75.203 20.78,75.203 17.402,75.228 18.545,75.254 54.359,75.838 55.324,75.838 56.34,75.889 90.306,76.117 19.637,76.295 20.78,76.295 17.402,76.371 18.57,76.371 58.397,77.184 44.199,77.387 19.586,77.413 17.427,77.438 20.805,77.438 18.57,77.463 33.378,78.022 49.838,78.505 36.172,78.581 90.433,78.733 16.589,78.987 36.198,79.368 55.349,80.74 67.795,81.959 80.806,82.289 44.224,82.772 17.249,82.924 38.636,83.356 31.372,83.585 34.445,83.712 95.157,84.194 60.429,85.718 35.487,86.074 64.036,86.277 10.747,86.43 15.598,86.887 43.665,87.192 64.011,87.369 9.807,88.284 64.671,89.401 64.671,90.062 60.785,90.214 60.175,90.265 78.698,90.367 73.917,91.941 97.824,92.119 4.219,93.059 97.672,98.114 49.711,98.342 10.087,98.622

## Polygon pours and split planes (outlines as drawn)
no net on Top Layer "GND-No Net" (solid, remove dead copper, pour order 14): 3,96.31 cw(c6.15,96.31) 6.15,99.46 72.037,99.46 cw(c72.037,96.234) 75.263,96.234 75.263,55.035 cw(c72.164,55.035) 72.164,51.936 6.404,51.936 cw(c6.404,55.34) 3,55.34
no net on Top Layer "GND-No Net" (solid, pour order 12): 78.939,66.599 97.126,66.599 cw(c97.126,64.846) 98.878,64.846 98.878,36.805 cw(c97.812,36.805) 97.812,35.738 78.508,35.738 cw(c78.508,36.982) 77.263,36.982 77.263,64.922 cw(c78.939,64.922)
no net on Top Layer "GND-No Net" (solid, pour order 10): 33.651,1.422 33.651,20.168 cw(c35.074,20.168) 35.074,21.59 63.191,21.59 cw(c63.191,20.396) 64.385,20.396 64.385,1.219 cw(c63.039,1.219) 63.039,-0.127 35.201,-0.127 cw(c35.201,1.422)
no net on Top Layer "GND-No Net" (solid, pour order 8): 33.651,25.038 33.651,43.783 cw(c35.074,43.783) 35.074,45.205 63.191,45.205 cw(c63.191,44.012) 64.385,44.012 64.385,24.835 cw(c63.039,24.835) 63.039,23.488 35.201,23.488 cw(c35.201,25.038)
no net on Top Layer "GND-No Net" (solid, pour order 6): 97.253,-0.025 78.533,-0.025 cw(c78.533,1.27) 77.238,1.27 77.238,29.21 cw(c78.889,29.21) 78.889,30.861 97.608,30.861 cw(c97.608,29.566) 98.904,29.566 98.904,1.626 cw(c97.253,1.626)
no net on Top Layer "GND-No Net" (solid, pour order 4): 78.774,99.358 97.57,99.358 cw(c97.57,98.012) 98.917,98.012 98.917,69.716 cw(c97.799,69.716) 97.799,68.599 78.393,68.599 cw(c78.393,69.767) 77.225,69.767 77.225,97.809 cw(c78.774,97.809) 78.774,99.358
no net on Top Layer "GND-No Net" (solid, pour order 2): 3,1.321 3,48.819 cw(c4.246,48.691) 4.118,49.936 30.965,49.936 cw(c30.895,49.307) 31.524,49.378 31.524,0.762 cw(c30.74,0.784) 30.762,0 4.321,0 cw(c4.329,1.329)
no net on Bottom Layer "GND-No Net" (solid, remove dead copper, pour order 15): 3,96.31 cw(c6.15,96.31) 6.15,99.46 72.037,99.46 cw(c72.037,96.234) 75.263,96.234 75.263,55.035 cw(c72.164,55.035) 72.164,51.936 6.404,51.936 cw(c6.404,55.34) 3,55.34
no net on Bottom Layer "GND-No Net" (solid, pour order 13): 78.939,66.599 97.126,66.599 cw(c97.126,64.846) 98.878,64.846 98.878,36.805 cw(c97.812,36.805) 97.812,35.738 78.508,35.738 cw(c78.508,36.982) 77.263,36.982 77.263,64.922 cw(c78.939,64.922)
no net on Bottom Layer "GND-No Net" (solid, pour order 11): 33.651,1.422 33.651,20.168 cw(c35.074,20.168) 35.074,21.59 63.191,21.59 cw(c63.191,20.396) 64.385,20.396 64.385,1.219 cw(c63.039,1.219) 63.039,-0.127 35.201,-0.127 cw(c35.201,1.422)
no net on Bottom Layer "GND-No Net" (solid, pour order 9): 33.651,25.038 33.651,43.783 cw(c35.074,43.783) 35.074,45.205 63.191,45.205 cw(c63.191,44.012) 64.385,44.012 64.385,24.835 cw(c63.039,24.835) 63.039,23.488 35.201,23.488 cw(c35.201,25.038)
no net on Bottom Layer "GND-No Net" (solid, pour order 7): 97.253,-0.025 78.533,-0.025 cw(c78.533,1.27) 77.238,1.27 77.238,29.21 cw(c78.889,29.21) 78.889,30.861 97.608,30.861 cw(c97.608,29.566) 98.904,29.566 98.904,1.626 cw(c97.253,1.626)
no net on Bottom Layer "GND-No Net" (solid, pour order 5): 78.774,99.358 97.57,99.358 cw(c97.57,98.012) 98.917,98.012 98.917,69.716 cw(c97.799,69.716) 97.799,68.599 78.393,68.599 cw(c78.393,69.767) 77.225,69.767 77.225,97.809 cw(c78.774,97.809) 78.774,99.358
no net on Bottom Layer "GND-No Net" (solid, pour order 3): 3,1.321 3,48.819 cw(c4.246,48.691) 4.118,49.936 30.965,49.936 cw(c30.895,49.307) 31.524,49.378 31.524,0.762 cw(c30.74,0.784) 30.762,0 4.321,0 cw(c4.329,1.329)

## Keep-outs
Keep-Out Layer:
  lines w0.1: 2.999,96.285 2.999,95.99 ; 3,96.285 cw(c6.429,96.031) 6.175,99.46 72.088,99.46 cw(c71.834,96.031) 75.263,96.285 75.262,95.228 ccw(c75.77,95.228) 75.77,94.72 76.761,94.72 ccw(c76.761,95.228) 77.269,95.228 ; 17.29,49.933 ccw(c17.29,50.441) 17.798,50.441 17.798,51.431 ccw(c17.29,51.431) 17.29,51.939 ; 17.29,49.936 3.991,49.936 ; 21.506,49.934 cw(c21.506,50.442) 20.998,50.442 20.998,51.432 cw(c21.506,51.432) 21.506,51.94 47.959,51.928 cw(c47.959,51.42) 48.467,51.42 48.467,45.756 cw(c47.959,45.756) 47.959,45.248 35.15,45.231 ccw(c35.15,43.605) 33.524,43.605 33.533,37.51 ; 21.506,49.936 30.534,49.936 cw(c30.534,48.946) 31.524,48.946 31.526,37.51 ; 31.526,33.294 31.528,13.456 ccw(c32.037,13.456) 32.037,12.948 33.027,12.948 ccw(c33.027,13.456) 33.535,13.456 ; 31.529,37.51 ccw(c32.037,37.51) 32.037,37.002 33.027,37.002 ccw(c33.027,37.51) 33.535,37.51 ; 31.53,33.294 cw(c32.038,33.294) 32.038,33.802 33.028,33.802 cw(c33.028,33.294) 33.536,33.294 33.524,25.241 ccw(c35.15,25.241) 35.15,23.615 45.325,23.607 ; 33.533,13.456 33.524,19.99 cw(c35.15,19.99) 35.15,21.615 45.325,21.601 ; 45.325,21.598 ccw(c45.325,22.106) 45.833,22.106 45.833,23.097 ccw(c45.325,23.097) 45.325,23.605 ; 52.175,45.246 62.76,45.231 ; 52.175,45.249 cw(c52.175,45.757) 51.667,45.757 51.667,51.421 cw(c52.175,51.421) 52.175,51.929 ; 64.373,38.154 cw(c65.084,38.154) 65.084,38.865 76.54,38.865 76.554,38.865 cw(c76.554,38.142) 77.277,38.142 77.277,37.363 77.263,37.363 ccw(c78.889,37.363) 78.889,35.738 97.253,35.738 ccw(c97.253,37.363) 98.878,37.363 98.881,38.859 98.878,64.494 98.878,64.973 ccw(c97.253,64.973) 97.253,66.599 91.011,66.586 ; 64.376,38.154 64.397,29.861 ; 64.381,25.428 cw(c65.092,25.428) 65.092,26.139 76.547,26.139 76.565,26.139 cw(c76.565,25.428) 77.276,25.428 77.276,6.319 cw(c76.565,6.319) 76.565,5.608 65.11,5.608 cw(c65.11,6.319) 64.398,6.319 ; 64.385,25.428 64.385,25.241 cw(c62.76,25.241) 62.76,23.615 49.541,23.606 ccw(c49.541,23.098) 49.033,23.098 49.033,22.108 ccw(c49.541,22.108) 49.541,21.6 62.76,21.615 cw(c62.76,19.99) 64.385,19.99 64.397,6.319 ; 64.398,29.861 ccw(c65.11,29.861) 65.11,29.15 76.565,29.15 77.178,29.15 ccw(c77.178,29.235) 77.263,29.235 cw(c78.889,29.235) 78.889,30.861 ; 75.258,59.449 cw(c75.766,59.449) 75.766,59.957 76.757,59.957 cw(c76.757,59.449) 77.265,59.449 77.269,42.777 cw(c76.557,42.777) 76.557,42.065 65.102,42.065 cw(c65.102,42.777) 64.391,42.777 ; 75.259,59.449 75.263,55.111 ; 77.263,71.021 77.263,70.224 ; 77.263,97.834 cw(c78.889,97.834) 78.889,99.46 97.253,99.46 cw(c97.253,97.834) 98.878,97.834 98.879,95.99 ; 77.27,91.012 ccw(c76.762,91.012) 76.762,91.52 75.771,91.52 ccw(c75.771,91.012) 75.263,91.012 75.267,75.127 ccw(c75.775,75.127) 75.775,74.619 76.766,74.619 ccw(c76.766,75.127) 77.274,75.127 77.274,91.012 ; 77.274,95.228 77.274,97.834 ; 77.275,70.911 ccw(c76.767,70.911) 76.767,71.419 75.777,71.419 ccw(c75.777,70.911) 75.269,70.911 ; 91.011,66.583 cw(c91.011,67.091) 90.503,67.091 90.503,68.082 cw(c91.011,68.082) 91.011,68.59 ; 91.011,68.592 97.253,68.599 ccw(c97.253,70.224) 98.878,70.224 ; 98.876,2.058 99.878,2.058 99.878,1.248 ; 98.884,64.494 99.392,64.494 99.9,64.494 99.9,70.463 98.883,70.463 ; 2.999,95.99 2,95.99 2,99.46 0,99.46 0,0 2,0 2,1.248 3,1.248 ; 2.999,95.99 3,56.686 ; 2.999,95.99 3,56.686 ; 3,1.248 3,48.365 ; 3,1.248 3,0.991 ccw(c3.991,0.991) 3.991,0 30.534,0 ; 3,48.365 3,48.946 ; 3,48.365 2.389,48.365 1.983,48.365 1.983,55.365 3,55.365 ; 3,48.946 cw(c3.991,48.946) 3.991,49.936 ; 3,48.946 cw(c3.991,48.946) 3.991,49.936 ; 3,55.111 ccw(c6.429,55.365) 6.175,51.936 ; 3,55.111 ccw(c6.429,55.365) 6.175,51.936 ; 3,55.111 3,55.365 ; 3,55.365 3,56.686 ; 6.175,51.936 6.683,51.936 ; 6.175,51.936 6.683,51.936 ; 6.683,51.936 17.29,51.939 ; 6.683,51.936 17.29,51.939 ; 30.534,0 ccw(c30.534,0.991) 31.524,0.991 ; 30.534,0 ccw(c30.534,0.991) 31.524,0.991 ; 31.524,0.991 31.53,9.24 cw(c32.038,9.24) 32.038,9.748 33.028,9.748 cw(c33.028,9.24) 33.536,9.24 ; 33.524,1.626 ccw(c35.15,1.626) 35.15,0 ; 33.524,1.626 ccw(c35.15,1.626) 35.15,0 ; 33.524,1.626 33.536,9.24 ; 33.524,1.626 33.536,9.24 ; 35.15,0 62.76,0 ; 35.15,0 62.76,0 ; 52.175,51.929 72.088,51.936 52.175,51.929 ; 62.76,0 ccw(c62.76,1.626) 64.385,1.626 ; 62.76,0 ccw(c62.76,1.626) 64.385,1.626 ; 62.76,45.231 cw(c62.76,43.605) 64.385,43.605 ; 62.76,45.231 cw(c62.76,43.605) 64.385,43.605 ; 64.381,1.697 cw(c65.092,1.697) 65.092,2.408 76.547,2.408 cw(c76.547,1.697) 77.258,1.697 77.263,1.626 ; 64.381,1.697 64.385,1.626 ; 64.381,1.697 64.385,1.626 ; 64.385,43.605 64.391,42.777 ; 64.385,43.605 64.391,42.777 ; 75.257,63.665 ccw(c75.765,63.665) 75.765,63.157 76.755,63.157 ccw(c76.755,63.665) 77.263,63.665 ; 75.257,63.665 75.269,70.911 ; 75.257,63.665 75.269,70.911 ; 75.263,55.111 cw(c71.834,55.365) 72.088,51.936 ccw(c71.834,55.365) 75.263,55.111 ; 77.263,1.626 ccw(c78.889,1.626) 78.889,0 ; 77.263,1.626 ccw(c78.889,1.626) 78.889,0 ; 77.263,63.665 77.263,64.973 ; 77.263,63.665 77.263,64.973 ; 77.263,64.973 cw(c78.889,64.973) 78.889,66.599 ; 77.263,64.973 cw(c78.889,64.973) 78.889,66.599 ; 77.263,70.224 ccw(c78.889,70.224) 78.889,68.599 ; 77.263,70.224 ccw(c78.889,70.224) 78.889,68.599 ; 78.889,0 97.253,0 ccw(c97.253,1.626) 98.878,1.626 98.878,2.058 98.878,28.215 98.878,29.235 ; 78.889,30.861 97.253,30.861 ; 78.889,30.861 97.253,30.861 ; 78.889,66.599 86.795,66.582 ; 78.889,66.599 86.795,66.582 ; 78.889,68.599 86.795,68.588 ; 78.889,68.599 86.795,68.588 ; 86.795,66.582 ccw(c86.795,67.09) 87.303,67.09 87.303,68.08 ccw(c86.795,68.08) 86.795,68.588 ; 97.253,30.861 cw(c97.253,29.235) 98.878,29.235 ; 97.253,30.861 cw(c97.253,29.235) 98.878,29.235 ; 98.878,70.224 98.878,70.463 98.879,95.99 ; 98.878,70.224 98.878,70.224 ; 98.878,70.224 98.878,70.224 ; 98.879,95.99 99.878,95.99 ; 99.878,1.248 99.878,1.248 ; 99.878,1.248 99.878,1.248 ; 99.878,1.248 99.878,0 101.878,0 101.878,99.46 99.878,99.46 99.878,95.99 ; 99.878,95.99 99.878,95.99
  lines w0.127: 98.894,28.215 99.881,28.215 99.881,32.904 99.881,38.873 98.894,38.873

## Other copper
Top Layer:
  region: 37.201,77.65 36.363,78.462 35.69,77.768 36.528,76.955
  region: 36.48,80.215 37.369,81.028 36.68,81.781 35.791,80.969
  region: 36.782,77.819 36.782,80.994 35.791,80.994 35.791,77.819
  region: 37.569,77.082 37.569,81.565 36.388,81.565 36.388,77.082
  region: 61.903,89.02 61.903,90.671 61.268,90.671 61.268,89.02
  region: 61.826,89.808 61.826,90.697 59.591,90.697 59.591,89.808
  region: 64.9,88.995 64.9,90.621 63.579,90.621 63.579,88.995
  region: 66.513,74.86 67.389,73.984 67.757,74.352 66.881,75.228
  region: 69.091,73.933 69.091,74.238 68.176,74.238 68.176,73.933
  region: 68.253,73.145 68.253,74.352 66.983,74.352 66.983,73.145
  region: 66.881,74.644 66.881,75.381 66.094,75.381 66.094,74.644
  region: 65.56,71.799 65.56,73.12 63.96,73.12 63.96,71.799
  region: 66.576,63.519 66.576,64.789 65.23,64.789 65.23,63.519
  region: 65.738,63.773 65.738,65.398 65.255,65.398 65.255,63.773
  region: 41.913,69.183 41.913,70.326 40.998,70.326 40.998,69.183
  region: 46.739,69.97 46.739,71.774 37.62,71.774 37.62,69.97
  region: 40.135,74.796 40.135,76.371 38.23,76.371 38.23,74.796
  region: 9.909,59.15 9.909,60.217 8.994,60.217 8.994,59.15
  rectangle: 16.284,72.993 21.999,78.454
  pour cut-out: 2.949,63.087 9.299,63.087 9.299,88.868 2.949,88.868
Bottom Layer:
  region: 65.992,89.097 65.992,90.544 63.655,90.544 63.655,89.097
  region: 67.973,73.018 67.973,74.593 66.703,74.593 66.703,73.018
  region: 62.588,95.472 62.588,97.479 59.947,97.479 59.947,95.472
  region: 60.404,91.078 60.404,97.199 59.032,97.199 59.032,91.078
  region: 60.937,88.995 60.937,91.179 59.032,91.179 59.032,88.995
  region: 64.316,74.339 64.316,75.914 62.741,75.914 62.741,74.339
  region: 37.595,78.048 37.595,80.181 35.69,80.181 35.69,78.048
  pour cut-out: 2.949,63.087 9.299,63.087 9.299,88.868 2.949,88.868

## Silkscreen, mask and mechanical layers (free items; w line width, h text height)
Top Overlay:
  drawing of 336 lines, arcs and shapes, not listed
  text "DA1" at 18.011,99.053 h0.66 r180
  text "Tx2" at 20.526,99.053 h0.66 r180
  text "To7" at 12.982,99.028 h0.66 r180
  text "DA2" at 15.598,99.028 h0.66 r180
  text "To3" at 25.657,99.028 h0.66 r180
  text "To6" at 28.197,99.028 h0.66 r180
  text "To4" at 30.788,99.028 h0.66 r180
  text "To2" at 38.357,99.028 h0.66 r180
  text "Rx2" at 23.218,99.003 h0.66 r180
  text "To0" at 35.791,99.003 h0.66 r180
  text "Rx0" at 40.948,99.003 h0.66 r180
  text "To5" at 33.302,98.977 h0.66 r180
  text "Tx0" at 43.437,98.977 h0.66 r180
  text "GND" at 54.105,98.952 h0.71 r270
  text "Pow" at 57.61,98.952 h0.71 r270
  text "5V" at 51.666,98.571 h0.71 r270
  text "5V" at 66.398,98.19 h0.71 r270
  text "17" at 20.297,97.606 h0.66 r180
  text "15" at 25.352,97.606 h0.66 r180
  text "14" at 27.892,97.606 h0.66 r180
  text "13" at 30.432,97.606 h0.66 r180
  text "4" at 35.309,97.606 h0.66 r180
  text "27" at 12.779,97.58 h0.66 r180
  text "16" at 22.837,97.58 h0.66 r180
  text "2" at 37.849,97.58 h0.66 r180
  text "3" at 40.389,97.58 h0.66 r180
  text "1" at 42.776,97.58 h0.66 r180
  text "26" at 15.243,97.555 h0.66 r180
  text "25" at 17.808,97.555 h0.66 r180
  text "12" at 32.972,97.555 h0.66 r180
  text "IO" at 46.129,95.675 h0.84 r180
  text "C" at 89.569,94.939 h1.09 r180
  text "L" at 92.008,94.913 h1.09 r180
  text "G" at 81.949,94.888 h1.09 r180
  text "D" at 87.004,94.888 h1.09 r180
  text "V" at 84.464,94.862 h1.09 r180
  text "GPIO" at 47.704,94.456 h0.99 r270
  text "GND" at 66.373,94.329 h0.71 r270
  text "3.3V" at 46.485,93.11 h0.74 r180
  text "12" at 9.553,91.916 h0.79 r180
  text "GND" at 46.383,90.57 h0.74 r180
  text "M1A" at 74.196,89.554 h0.74 r180
  text "2" at 46.51,87.217 h0.66 r180
  text "M11" at 59.388,87.192 h0.66 r180
  text "M1B" at 74.145,87.039 h0.74 r180
  text "4" at 46.51,86.023 h0.66 r180
  text "M12" at 59.439,85.896 h0.66 r180
  text "13" at 46.739,84.652 h0.66 r180
  text "M21" at 59.388,84.626 h0.66 r180
  text "27" at 46.815,83.407 h0.66 r180
  text "M22" at 59.49,83.305 h0.66 r180
  text "IO0" at 70.285,80.664 h0.66 r180
  text "Rx" at 45.24,79.191 h0.66 r180
  text "Tx" at 45.266,75.304 h0.66 r180
  text "595串入并出数码管" at 97.895,71.774 h1.5 r90
  text "EN" at 69.827,71.418 h0.66 r180
  text "M2A" at 74.222,65.017 h0.66 r180
  text "C" at 90.954,62.281 h1.01 r180
  text "G" at 80.768,62.255 h1.01 r180
  text "V" at 83.207,62.255 h1.01 r180
  text "A" at 85.874,62.255 h1.01 r180
  text "B" at 88.414,62.255 h1.01 r180
  text "D" at 93.468,62.255 h1.01 r180
  text "M2B" at 74.171,61.969 h0.66 r180
  text "GND" at 29.873,61.715 h0.79 r180
  text "GPIO" at 30.965,60.801 h1.22 r270
  text "IIC" at 62.919,60.318 h1.42 r270
  text "SPI" at 49.406,60.166 h1.42 r270
  text "3.3V" at 29.873,59.201 h0.79 r180
  text "+" at 65.535,58.896 h0.64
  text "ADC" at 29.924,56.635 h0.79 r180
  text "3.3V" at 58.042,54.68 h0.64 r270
  text "A0" at 16.538,54.629 h0.69 r180
  text "A6" at 21.593,54.629 h0.69 r180
  text "3.3V" at 44.427,54.629 h0.71 r270
  text "A3" at 13.998,54.603 h0.69 r180
  text "A7" at 19.078,54.603 h0.69 r180
  text "A5" at 24.133,54.603 h0.69 r180
  text "A4" at 26.622,54.603 h0.69 r180
  text "CS" at 35.258,54.603 h0.64 r180
  text "SCL" at 54.054,54.603 h0.64 r180
  text "SDA" at 56.772,54.603 h0.64 r180
  text "SCK" at 38.103,54.578 h0.64 r180
  text "MOSIMISO" at 43.386,54.578 h0.64 r180
  text "GND" at 47.018,54.578 h0.71 r270
  text "GND" at 60.607,54.349 h0.64 r270
  text "-" at 64.036,53.41 h0.64
  text "5" at 34.928,53.283 h0.71 r180
  text "23" at 42.827,53.257 h0.71 r180
  text "36" at 16.462,53.232 h0.69 r180
  text "35" at 18.977,53.232 h0.69 r180
  text "32" at 26.647,53.232 h0.69 r180
  text "18" at 37.671,53.232 h0.71 r180
  text "19" at 40.186,53.232 h0.71 r180
  text "39" at 13.947,53.206 h0.69 r180
  text "34" at 21.542,53.206 h0.69 r180
  text "33" at 24.082,53.206 h0.69 r180
  text "22" at 53.851,53.181 h0.64 r180
  text "21" at 56.213,53.156 h0.64 r180
  text "Ao" at 83.435,43.129 h0.83 r180
  text "Co" at 88.515,43.104 h0.83 r180
  text "Do" at 90.954,43.104 h0.83 r180
  text "Bo" at 85.95,43.078 h0.83 r180
  text "v" at 93.392,42.951 h0.83 r180
  text "ULN2003" at 97.989,42.393 h1.06 r90
  text "双595输出" at 3.873,41.209 h2 r270
  text "G" at 52.269,36.163 h1.02 r90
  text "V" at 52.219,33.877 h1.02 r90
  text "1" at 14.176,33.503 h1.17 r270
  text "S" at 51.203,32.251 h1.02 r270
  text "L" at 3.965,30.632 h1.17 r270
  text "Y" at 93.24,29.21 h1.02
  text "Z" at 82.292,29.159 h1.02
  text "X" at 87.753,29.134 h1.02
  text "C" at 3.914,28.194 h1.17 r270
  text "MPU6050" at 78.254,27.28 h0.99 r270
  text "D" at 3.94,25.629 h1.17 r270
  text "数码光电模块" at 46.834,25.464 h1.5 r180
  text "V" at 3.889,23.114 h1.17 r270
  text "G" at 3.914,20.574 h1.17 r270
  text "C" at 84.629,13.64 h1.02
  text "V" at 88.744,13.64 h1.02
  text "G" at 90.877,13.64 h1.02
  text "D" at 86.712,13.589 h1.02
  text "G" at 52.269,12.548 h1.02 r90
  text "V" at 52.219,10.262 h1.02 r90
  text "S" at 51.203,8.636 h1.02 r270
  text "数码光电模块" at 46.834,1.848 h1.5 r180